# EAGLE board LCD 1602 Display (EAGLE 9.7.0)

Size 131.33 x 140.61 mm. Coordinates in mm from the lower left corner, seen from the top.
Outline: 0,0 131.33,0 131.33,140.61 0,140.61 0,0
Copper layers (1*16): Top 0.035mm / dielectric 1.5mm / Bottom 0.035mm
Design rules "default": minimum track width 6mil, minimum drill 0.35mm, track to track 6mil, track to pad 6mil, pad to pad 6mil, via to via 6mil, smd to smd 6mil, copper to edge 40mil, drill to drill 6mil, minimum pad ring 10mil, minimum via ring 8mil, stop-mask expansion 4mil, vias tented up to drill 0mil, thermal gap 10mil

## Footprints (pad centres in the part's own frame; a part is rotated, then mirrored left to right if it is on the bottom)
HA-06-SM065 = drill 1 pad 1.676: 1 -2.54,-2.54; 2 0,2.54; 3 2.54,-2.54
ARDUINO-UNO-R3-SHIELD = drill 1.016 pad 1.88: 3.3V 24.13,-2.54; 5V 24.13,0; A0 24.13,12.7; A1 24.13,15.24; A2 24.13,17.78; A3 24.13,20.32; A4 24.13,22.86; A5 24.13,25.4; AREF -24.13,-13.97; D2 -24.13,20.32; D3 -24.13,17.78; D4 -24.13,15.24; D5 -24.13,12.7; D6 -24.13,10.16; D7 -24.13,7.62; D8 -24.13,3.81; D9 -24.13,1.27; D10 -24.13,-1.27; D11 -24.13,-3.81; D12 -24.13,-6.35; D13 -24.13,-8.89; GND@0 24.13,2.54; GND@1 24.13,5.08; GND@2 -24.13,-11.43; IOREF 24.13,-7.62; NC 24.13,-10.16; RES 24.13,-5.08; RX -24.13,25.4; SCL -24.13,-19.05; SDA -24.13,-16.51; TX -24.13,22.86; VIN 24.13,7.62
JHD-162A = drill 1.016 long: 1 -19.05,0; 2 -16.51,0; 3 -13.97,0; 4 -11.43,0; 5 -8.89,0; 6 -6.35,0; 7 -3.81,0; 8 -1.27,0; 9 1.27,0; 10 3.81,0; 11 6.35,0; 12 8.89,0; 13 11.43,0; 14 13.97,0; 15 16.51,0; 16 19.05,0

## Placement (x,y rotation side)
RPOT10K_POTENTIOMETER1  10k  [HA-06-SM065]  124.28,71.33 270 top
RPOT10K_POTENTIOMETER4  10k  [HA-06-SM065]  124.28,38.31 270 top
UARDUINO_UNO_  ARDUINO-UNO-R3-SHIELD  [ARDUINO-UNO-R3-SHIELD]  54.36,110.77 90 top
ULCD_1602_DISPLAY  LCD-16X2JHD-162A  [JHD-162A]  30.73,36.63 0 top

## Library data of the parts
RPOT10K_POTENTIOMETER1 RPOT10K_POTENTIOMETER4 UARDUINO_UNO_ ULCD_1602_DISPLAY = Tinkercad

## Nets
UARDUINO_UNO__5V: RPOT10K_POTENTIOMETER1.3 RPOT10K_POTENTIOMETER4.1 UARDUINO_UNO_.5V ULCD_1602_DISPLAY.2
UARDUINO_UNO__D2: UARDUINO_UNO_.D2 ULCD_1602_DISPLAY.14
UARDUINO_UNO__D3: UARDUINO_UNO_.D3 ULCD_1602_DISPLAY.13
UARDUINO_UNO__D4: UARDUINO_UNO_.D4 ULCD_1602_DISPLAY.12
UARDUINO_UNO__D5: UARDUINO_UNO_.D5 ULCD_1602_DISPLAY.11
UARDUINO_UNO__D11: UARDUINO_UNO_.D11 ULCD_1602_DISPLAY.6
UARDUINO_UNO__D12: UARDUINO_UNO_.D12 ULCD_1602_DISPLAY.4
UARDUINO_UNO__GND: RPOT10K_POTENTIOMETER1.1 RPOT10K_POTENTIOMETER4.3 UARDUINO_UNO_.GND@0 UARDUINO_UNO_.GND@1 UARDUINO_UNO_.GND@2 ULCD_1602_DISPLAY.1 ULCD_1602_DISPLAY.5 ULCD_1602_DISPLAY.16
ULCD_1602_DISPLAY_LED+: RPOT10K_POTENTIOMETER4.2 ULCD_1602_DISPLAY.15
ULCD_1602_DISPLAY_VO: RPOT10K_POTENTIOMETER1.2 ULCD_1602_DISPLAY.3

## Tracks (layer width: path | path; a pad name or v marks a point on that pad's centre or on a via)
UARDUINO_UNO__5V  (3 unrouted)
UARDUINO_UNO__D2  (1 unrouted)
UARDUINO_UNO__D3  (1 unrouted)
UARDUINO_UNO__D4  (1 unrouted)
UARDUINO_UNO__D5  (1 unrouted)
UARDUINO_UNO__D11  (1 unrouted)
UARDUINO_UNO__D12  (1 unrouted)
UARDUINO_UNO__GND  (7 unrouted)
ULCD_1602_DISPLAY_LED+  (1 unrouted)
ULCD_1602_DISPLAY_VO  (1 unrouted)